# Altium PCB 110-00315-D_B1-DevKit.PcbDoc (part 6 of 9)
Units mil, origin at the board's own origin, x right, y up, seen from the top; angles counter-clockwise.
Board outline 5199.57 x 2702 mil, 8 copper layers (Top Layer, Layer 2-GND-Plane, Layer 3, Layer 4, Layer 5, Layer 6, Layer 7-PWR-Plane, Bottom Layer), stack 60.866 mil thick; 418 components, 298 nets, 1591 pads, 1631 vias.
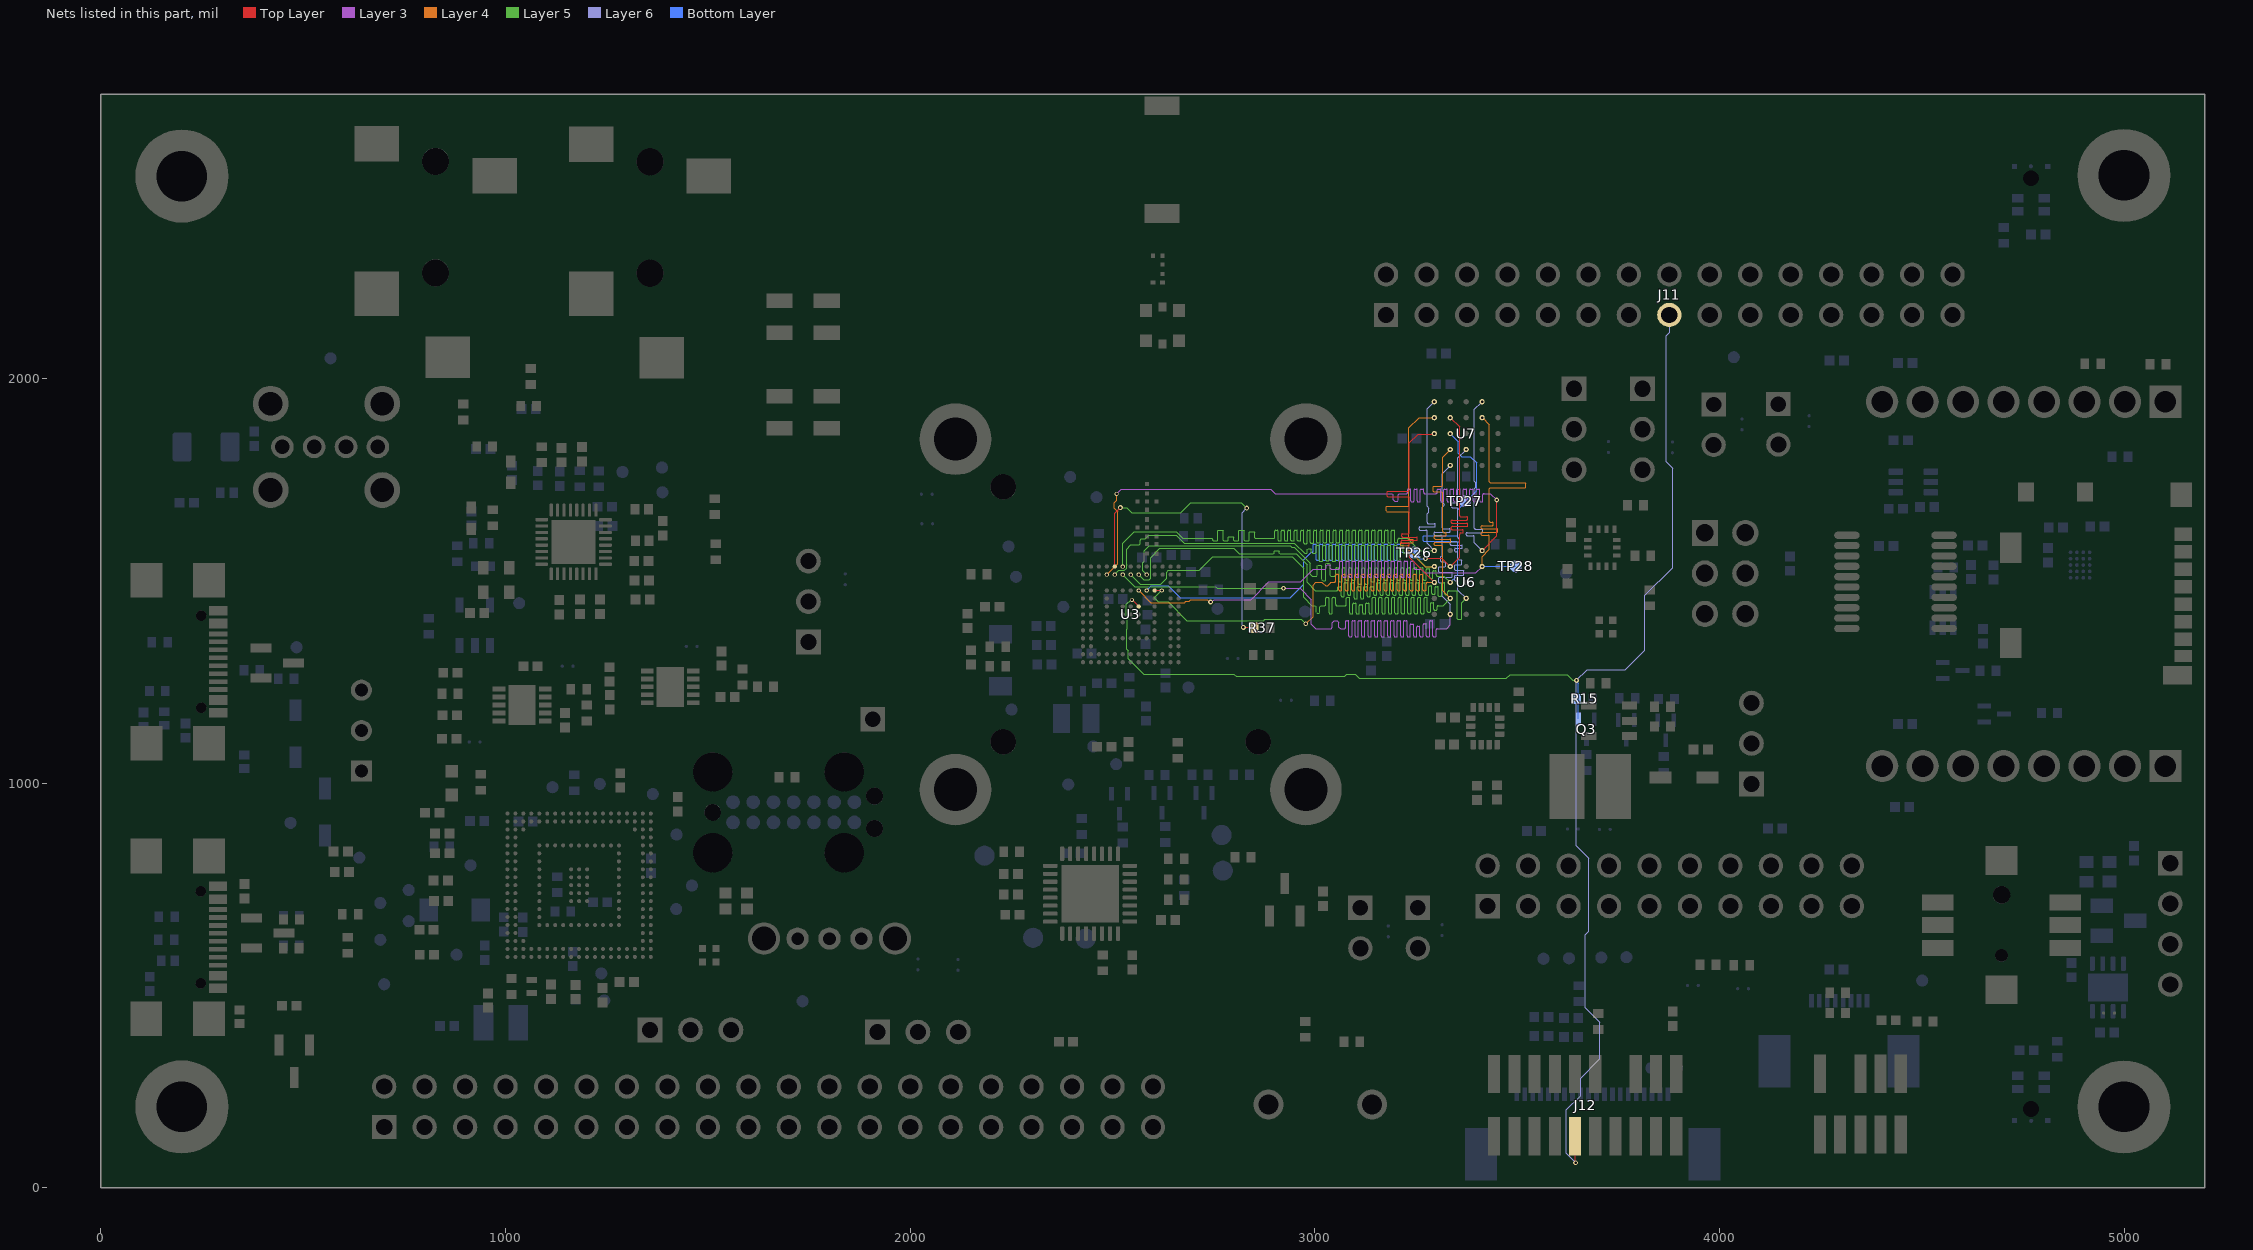
[diagram p11: the nets of this part, all layers, seen from the top]

## Via types
v1: diameter 20, hole 10, Top Layer to Bottom Layer, tented both sides, 773 vias
v2: diameter 12, hole 6, Top Layer to Bottom Layer, tented both sides, 549 vias
v3: diameter 12, hole 6, Top Layer to Bottom Layer, 194 vias
v4: diameter 10, hole 6, Top Layer to Bottom Layer, 101 vias
v5: diameter 10, hole 6, Top Layer to Bottom Layer, tented both sides, 10 vias
v6: diameter 15, hole 8, Top Layer to Bottom Layer, 4 vias

## Nets (pads, with @x,y where several pads share a name; then routed paths per layer and width w, separated by ;. In a path a pad name is that pad's centre, name@x,y a point inside that pad or via, vN(x,y) a via of type N, cw(c..) or ccw(c..) an arc to the next point about the centre after c; other vN are vias at no path point) (continued)
P3_0: TP27.1 U3.E2 U6.D3 U7.D3 | length 2529
  Top Layer w3: v3(3334.63,1496) U6.D3@3334.63,1496.69
  Layer 5 w3: v4(2584.32,1515.48) 2574.82,1524.98 2574.82,1544.87 2578.52,1548.57 2578.52,1574.69 2590.13,1586.3 2939.03,1586.3 2942.53,1582.8 2949.53,1582.8 2988.53,1543.8 2988.53,1516.8 2993.53,1511.8 3004.53,1511.8 3006.53,1513.8 3006.53,1536.8 3008.53,1538.8 3014.53,1538.8 3017.53,1535.8 3017.53,1503.8 ; 3017.53,1502.8 3020.53,1499.8 3025.53,1499.8 3027.53,1501.8 3027.53,1542.04 3029.29,1543.8 3035.77,1543.8 3037.53,1542.04 ; 3037.53,1541.8 3037.53,1513.8 3039.53,1511.8 3047.18,1511.8 3048.68,1511.8 ccw(c3048.68,1514.8) 3051.68,1514.8 3051.68,1529.8 cw(c3053.68,1529.8) 3053.68,1531.8 3057.68,1531.8 cw(c3057.68,1529.8) 3059.68,1529.8 3059.68,1499.31 ccw(c3061.68,1499.31) 3061.68,1497.31 3065.68,1497.31 ccw(c3065.68,1499.31) 3067.68,1499.31 3067.68,1529.8 cw(c3069.68,1529.8) 3069.68,1531.8 3073.68,1531.8 cw(c3073.68,1529.8) 3075.68,1529.8 3075.68,1503.8 ccw(c3077.68,1503.8) 3077.68,1501.8 3081.68,1501.8 ccw(c3081.68,1503.8) 3083.68,1503.8 3083.68,1529.8 cw(c3085.68,1529.8) 3085.68,1531.8 3089.68,1531.8 cw(c3089.68,1529.8) 3091.68,1529.8 3091.68,1503.8 ccw(c3093.68,1503.8) 3093.68,1501.8 3097.68,1501.8 ccw(c3097.68,1503.8) 3099.68,1503.8 3099.68,1529.8 cw(c3101.68,1529.8) 3101.68,1531.8 3105.68,1531.8 cw(c3105.68,1529.8) 3107.68,1529.8 3107.68,1493.8 ccw(c3109.68,1493.8) 3109.68,1491.8 3113.68,1491.8 ccw(c3113.68,1493.8) 3115.68,1493.8 3115.68,1529.8 cw(c3117.68,1529.8) 3117.68,1531.8 3121.68,1531.8 cw(c3121.68,1529.8) 3123.68,1529.8 3123.68,1493.8 ccw(c3125.68,1493.8) 3125.68,1491.8 3129.68,1491.8 ccw(c3129.68,1493.8) 3131.68,1493.8 3131.68,1529.8 cw(c3133.68,1529.8) 3133.68,1531.8 3137.68,1531.8 cw(c3137.68,1529.8) 3139.68,1529.8 3139.68,1499.34 ccw(c3141.68,1499.34) 3141.68,1497.34 3145.68,1497.34 ccw(c3145.68,1499.34) 3147.68,1499.34 3147.68,1529.8 cw(c3149.68,1529.8) 3149.68,1531.8 3153.68,1531.8 cw(c3153.68,1529.8) 3155.68,1529.8 3155.68,1503.8 ccw(c3157.68,1503.8) 3157.68,1501.8 3161.68,1501.8 ccw(c3161.68,1503.8) 3163.68,1503.8 3163.68,1529.8 cw(c3165.68,1529.8) 3165.68,1531.8 3169.68,1531.8 cw(c3169.68,1529.8) 3171.68,1529.8 3171.68,1503.8 ccw(c3173.68,1503.8) 3173.68,1501.8 3177.68,1501.8 ccw(c3177.68,1503.8) 3179.68,1503.8 3179.68,1529.8 cw(c3181.68,1529.8) 3181.68,1531.8 3185.68,1531.8 cw(c3185.68,1529.8) 3187.68,1529.8 3187.68,1503.8 ccw(c3189.68,1503.8) 3189.68,1501.8 3193.68,1501.8 ccw(c3193.68,1503.8) 3195.68,1503.8 3195.68,1529.8 cw(c3197.68,1529.8) 3197.68,1531.8 3201.68,1531.8 cw(c3201.68,1529.8) 3203.68,1529.8 3203.68,1503.8 ccw(c3205.68,1503.8) 3205.68,1501.8 3209.68,1501.8 ccw(c3209.68,1503.8) 3211.68,1503.8 3211.68,1529.8 cw(c3213.68,1529.8) 3213.68,1531.8 3217.68,1531.8 cw(c3217.68,1529.8) 3219.68,1529.8 3219.68,1503.8 ccw(c3221.68,1503.8) 3221.68,1501.8 3225.68,1501.8 ccw(c3225.68,1503.8) 3227.68,1503.8 3227.68,1529.8 cw(c3229.68,1529.8) 3229.68,1531.8 3233.68,1531.8 cw(c3233.68,1529.8) 3235.68,1529.8 3235.68,1503.8 ccw(c3237.68,1503.8) 3237.68,1501.8 3241.68,1501.8 ccw(c3241.68,1503.8) 3243.68,1503.8 3243.68,1529.8 cw(c3245.68,1529.8) 3245.68,1531.8 3249.68,1531.8 cw(c3249.68,1529.8) 3251.68,1529.8 3251.68,1503.8 ccw(c3253.68,1503.8) 3253.68,1501.8 3257.68,1501.8 ccw(c3257.68,1503.8) 3259.68,1503.8 3259.68,1529.8 cw(c3261.68,1529.8) 3261.68,1531.8 3265.68,1531.8 cw(c3265.68,1529.8) 3267.68,1529.8 3267.68,1503.8 ccw(c3269.68,1503.8) 3269.68,1501.8 3273.68,1501.8 ccw(c3273.68,1503.8) 3275.68,1503.8 3275.68,1527.37 cw(c3277.68,1527.37) 3277.68,1529.37 3281.68,1529.37 cw(c3281.68,1527.37) 3283.68,1527.37 3283.68,1508.5 ccw(c3285.68,1508.5) 3285.68,1506.5 3289.68,1506.5 ccw(c3289.68,1508.5) 3291.68,1508.5 3291.68,1522.87 cw(c3293.68,1522.87) 3293.68,1524.87 3297.68,1524.87 cw(c3297.68,1522.87) 3299.68,1522.87 3299.68,1514.8 ccw(c3302.68,1514.8) 3302.68,1511.8 3311.53,1511.8 3318.84,1511.8 v3(3334.63,1496)
  Layer 4 w3: v3(3334.61,1863.88) 3335.61,1862.88 v3@3335.61,1861.88
  Bottom Layer w3: v3@3333.53,1864.8 v3@3333.69,1864.8 ; v3@3333.53,1865.8 3333.53,1864.95 v3@3333.69,1864.8 ; v3(3334.63,1496) 3352.53,1513.9 3352.53,1595 3352.53,1596.5 3350.77,1598.26 3268.98,1598.26 3267.68,1599.56 3267.68,1609.96 3268.98,1611.26 3350.77,1611.26 3352.53,1613.02 3352.53,1626 3352.53,1675.8 3372.49,1695.75 3399.53,1722.8 3399.53,1791.8 3384.53,1806.8 3363.53,1806.8 3354.53,1815.8 3354.53,1843.95 v3(3334.61,1863.88) v3@3333.69,1864.8
P3_1: TP26.1 U3.E4 U6.D2 U7.D2 | length 2451.6
  Top Layer w3: v3(3273.53,1554.8) 3274.53,1555.8 3314.21,1555.8 v3(3334.63,1535.37) 3357.53,1558.27 3357.53,1563.8 3357.53,1615.3 cw(c3360.53,1615.3) 3360.53,1618.3 3364.46,1618.3 ccw(c3364.46,1620.3) 3366.46,1620.3 3366.46,1624.3 ccw(c3364.46,1624.3) 3364.46,1626.3 3339.53,1626.3 cw(c3339.53,1628.3) 3337.53,1628.3 3337.53,1632.3 cw(c3339.53,1632.3) 3339.53,1634.3 3375.53,1634.3 ccw(c3375.53,1636.3) 3377.53,1636.3 3377.53,1640.3 ccw(c3375.53,1640.3) 3375.53,1642.3 3339.53,1642.3 cw(c3339.53,1644.3) 3337.53,1644.3 3337.53,1648.3 cw(c3339.53,1648.3) 3339.53,1650.3 3375.53,1650.3 ccw(c3375.53,1652.3) 3377.53,1652.3 3377.53,1656.3 ccw(c3375.53,1656.3) 3375.53,1658.3 3360.53,1658.3 cw(c3360.53,1661.3) 3357.53,1661.3 3357.53,1662.8 3357.53,1880.32 v3(3334.61,1903.25) ; U7.D2@3335.53,1902.32 U7.D2@3335.53,1904.8
  Bottom Layer w3: v4(2584.32,1476.11) 2596,1487.8 2637.94,1487.8 2667.54,1458.2 2938.93,1458.2 2972.53,1491.8 2972.53,1551.8 2991.31,1570.57 2991.53,1570.57 2993.03,1570.57 ccw(c2993.03,1573.57) 2996.03,1573.57 2996.03,1588.57 cw(c2998.03,1588.57) 2998.03,1590.57 3002.03,1590.57 cw(c3002.03,1588.57) 3004.03,1588.57 3004.03,1552.57 ccw(c3006.03,1552.57) 3006.03,1550.57 3010.03,1550.57 ccw(c3010.03,1552.57) 3012.03,1552.57 3012.03,1588.57 cw(c3014.03,1588.57) 3014.03,1590.57 3018.03,1590.57 cw(c3018.03,1588.57) 3020.03,1588.57 3020.03,1552.57 ccw(c3022.03,1552.57) 3022.03,1550.57 3026.03,1550.57 ccw(c3026.03,1552.57) 3028.03,1552.57 3028.03,1588.57 cw(c3030.03,1588.57) 3030.03,1590.57 3034.03,1590.57 cw(c3034.03,1588.57) 3036.03,1588.57 3036.03,1552.57 ccw(c3038.03,1552.57) 3038.03,1550.57 3042.03,1550.57 ccw(c3042.03,1552.57) 3044.03,1552.57 3044.03,1588.57 cw(c3046.03,1588.57) 3046.03,1590.57 3050.03,1590.57 cw(c3050.03,1588.57) 3052.03,1588.57 3052.03,1552.57 ccw(c3054.03,1552.57) 3054.03,1550.57 3058.03,1550.57 ccw(c3058.03,1552.57) 3060.03,1552.57 3060.03,1588.57 cw(c3062.03,1588.57) 3062.03,1590.57 3066.03,1590.57 cw(c3066.03,1588.57) 3068.03,1588.57 3068.03,1552.57 ccw(c3070.03,1552.57) 3070.03,1550.57 3074.03,1550.57 ccw(c3074.03,1552.57) 3076.03,1552.57 3076.03,1588.57 cw(c3078.03,1588.57) 3078.03,1590.57 3082.03,1590.57 cw(c3082.03,1588.57) 3084.03,1588.57 3084.03,1552.57 ccw(c3086.03,1552.57) 3086.03,1550.57 3090.03,1550.57 ccw(c3090.03,1552.57) 3092.03,1552.57 3092.03,1588.57 cw(c3094.03,1588.57) 3094.03,1590.57 3098.03,1590.57 cw(c3098.03,1588.57) 3100.03,1588.57 3100.03,1552.57 ccw(c3102.03,1552.57) 3102.03,1550.57 3106.03,1550.57 ccw(c3106.03,1552.57) 3108.03,1552.57 3108.03,1588.57 cw(c3110.03,1588.57) 3110.03,1590.57 3114.03,1590.57 cw(c3114.03,1588.57) 3116.03,1588.57 3116.03,1552.57 ccw(c3118.03,1552.57) 3118.03,1550.57 3122.03,1550.57 ccw(c3122.03,1552.57) 3124.03,1552.57 3124.03,1588.57 cw(c3126.03,1588.57) 3126.03,1590.57 3130.03,1590.57 cw(c3130.03,1588.57) 3132.03,1588.57 3132.03,1552.57 ccw(c3134.03,1552.57) 3134.03,1550.57 3138.03,1550.57 ccw(c3138.03,1552.57) 3140.03,1552.57 3140.03,1588.57 cw(c3142.03,1588.57) 3142.03,1590.57 3146.03,1590.57 cw(c3146.03,1588.57) 3148.03,1588.57 3148.03,1552.57 ccw(c3150.03,1552.57) 3150.03,1550.57 3154.03,1550.57 ccw(c3154.03,1552.57) 3156.03,1552.57 3156.03,1588.57 cw(c3158.03,1588.57) 3158.03,1590.57 3162.03,1590.57 cw(c3162.03,1588.57) 3164.03,1588.57 3164.03,1552.57 ccw(c3166.03,1552.57) 3166.03,1550.57 3170.03,1550.57 ccw(c3170.03,1552.57) 3172.03,1552.57 3172.03,1588.57 cw(c3174.03,1588.57) 3174.03,1590.57 3178.03,1590.57 cw(c3178.03,1588.57) 3180.03,1588.57 3180.03,1552.57 ccw(c3182.03,1552.57) 3182.03,1550.57 3186.03,1550.57 ccw(c3186.03,1552.57) 3188.03,1552.57 3188.03,1588.57 cw(c3190.03,1588.57) 3190.03,1590.57 3194.03,1590.57 cw(c3194.03,1588.57) 3196.03,1588.57 3196.03,1552.57 ccw(c3198.03,1552.57) 3198.03,1550.57 3202.03,1550.57 ccw(c3202.03,1552.57) 3204.03,1552.57 3204.03,1588.57 cw(c3206.03,1588.57) 3206.03,1590.57 3210.03,1590.57 cw(c3210.03,1588.57) 3212.03,1588.57 3212.03,1573.57 ccw(c3215.03,1573.57) 3215.03,1570.57 3226.53,1570.57 3244.81,1570.57 TP26.1@3245.58,1569.8 3260.58,1554.8 v3(3273.53,1554.8)
P3_2: U3.F2 U6.C4 U7.C4 | length 2556.4
  Layer 5 w3: v4@2566.12,1514 2577,1503.11 2591.16,1503.11 2594.5,1506.45 2594.5,1557.5 2617,1580 2799.55,1580 2812.75,1566.8 2896,1566.8 2897.5,1566.8 2899.26,1568.55 2899.26,1572.72 2900.56,1574.02 2910.96,1574.02 2912.26,1572.72 2912.26,1568.55 2914.02,1566.8 2938,1566.8 2953.53,1566.8 2981,1539.33 2981,1496.33 3001.53,1475.8 3052.53,1475.8 3054.03,1475.8 ccw(c3054.03,1478.8) 3057.03,1478.8 3057.03,1483.8 cw(c3059.03,1483.8) 3059.03,1485.8 3063.03,1485.8 cw(c3063.03,1483.8) 3065.03,1483.8 3065.03,1462.94 ccw(c3067.03,1462.94) 3067.03,1460.94 3071.03,1460.94 ccw(c3071.03,1462.94) 3073.03,1462.94 3073.03,1493.8 cw(c3075.03,1493.8) 3075.03,1495.8 3079.03,1495.8 cw(c3079.03,1493.8) 3081.03,1493.8 3081.03,1466.8 ccw(c3083.03,1466.8) 3083.03,1464.8 3087.03,1464.8 ccw(c3087.03,1466.8) 3089.03,1466.8 3089.03,1493.8 cw(c3091.03,1493.8) 3091.03,1495.8 3095.03,1495.8 cw(c3095.03,1493.8) 3097.03,1493.8 3097.03,1457.8 ccw(c3099.03,1457.8) 3099.03,1455.8 3103.03,1455.8 ccw(c3103.03,1457.8) 3105.03,1457.8 3105.03,1483.8 cw(c3107.03,1483.8) 3107.03,1485.8 3111.03,1485.8 cw(c3111.03,1483.8) 3113.03,1483.8 3113.03,1457.8 ccw(c3115.03,1457.8) 3115.03,1455.8 3119.03,1455.8 ccw(c3119.03,1457.8) 3121.03,1457.8 3121.03,1483.8 cw(c3123.03,1483.8) 3123.03,1485.8 3127.03,1485.8 cw(c3127.03,1483.8) 3129.03,1483.8 3129.03,1462.94 ccw(c3131.03,1462.94) 3131.03,1460.94 3135.03,1460.94 ccw(c3135.03,1462.94) 3137.03,1462.94 3137.03,1483.8 cw(c3139.03,1483.8) 3139.03,1485.8 3143.03,1485.8 cw(c3143.03,1483.8) 3145.03,1483.8 3145.03,1466.8 ccw(c3147.03,1466.8) 3147.03,1464.8 3151.03,1464.8 ccw(c3151.03,1466.8) 3153.03,1466.8 3153.03,1493.8 cw(c3155.03,1493.8) 3155.03,1495.8 3159.03,1495.8 cw(c3159.03,1493.8) 3161.03,1493.8 3161.03,1466.8 ccw(c3163.03,1466.8) 3163.03,1464.8 3167.03,1464.8 ccw(c3167.03,1466.8) 3169.03,1466.8 3169.03,1493.8 cw(c3171.03,1493.8) 3171.03,1495.8 3175.03,1495.8 cw(c3175.03,1493.8) 3177.03,1493.8 3177.03,1466.8 ccw(c3179.03,1466.8) 3179.03,1464.8 3183.03,1464.8 ccw(c3183.03,1466.8) 3185.03,1466.8 3185.03,1493.8 cw(c3187.03,1493.8) 3187.03,1495.8 3191.03,1495.8 cw(c3191.03,1493.8) 3193.03,1493.8 3193.03,1466.8 ccw(c3195.03,1466.8) 3195.03,1464.8 3199.03,1464.8 ccw(c3199.03,1466.8) 3201.03,1466.8 3201.03,1493.8 cw(c3203.03,1493.8) 3203.03,1495.8 3207.03,1495.8 cw(c3207.03,1493.8) 3209.03,1493.8 3209.03,1466.8 ccw(c3211.03,1466.8) 3211.03,1464.8 3215.03,1464.8 ccw(c3215.03,1466.8) 3217.03,1466.8 3217.03,1493.8 cw(c3219.03,1493.8) 3219.03,1495.8 3223.03,1495.8 cw(c3223.03,1493.8) 3225.03,1493.8 3225.03,1466.8 ccw(c3227.03,1466.8) 3227.03,1464.8 3231.03,1464.8 ccw(c3231.03,1466.8) 3233.03,1466.8 3233.03,1493.8 cw(c3235.03,1493.8) 3235.03,1495.8 3239.03,1495.8 cw(c3239.03,1493.8) 3241.03,1493.8 3241.03,1466.8 ccw(c3243.03,1466.8) 3243.03,1464.8 3247.03,1464.8 ccw(c3247.03,1466.8) 3249.03,1466.8 3249.03,1493.8 cw(c3251.03,1493.8) 3251.03,1495.8 3255.03,1495.8 cw(c3255.03,1493.8) 3257.03,1493.8 3257.03,1466.8 ccw(c3259.03,1466.8) 3259.03,1464.8 3263.03,1464.8 ccw(c3263.03,1466.8) 3265.03,1466.8 3265.03,1493.8 cw(c3267.03,1493.8) 3267.03,1495.8 3271.03,1495.8 cw(c3271.03,1493.8) 3273.03,1493.8 3273.03,1466.8 ccw(c3275.03,1466.8) 3275.03,1464.8 3279.03,1464.8 ccw(c3279.03,1466.8) 3281.03,1466.8 3281.03,1485.38 cw(c3283.03,1485.38) 3283.03,1487.38 3287.03,1487.38 cw(c3287.03,1485.38) 3289.03,1485.38 3289.03,1469.13 ccw(c3291.03,1469.13) 3291.03,1467.13 3295.03,1467.13 ccw(c3295.03,1469.13) 3297.03,1469.13 3297.03,1483.5 cw(c3299.03,1483.5) 3299.03,1485.5 3303.03,1485.5 cw(c3303.03,1483.5) 3305.03,1483.5 3305.03,1463.71 ccw(c3307.03,1463.71) 3307.03,1461.71 3311.03,1461.71 ccw(c3311.03,1463.71) 3313.03,1463.71 3313.03,1493.8 cw(c3315.03,1493.8) 3315.03,1495.8 3319.03,1495.8 cw(c3319.03,1493.8) 3321.03,1493.8 3321.03,1467.88 ccw(c3323.03,1467.88) 3323.03,1465.88 3327.03,1465.88 ccw(c3327.03,1467.88) 3329.03,1467.88 3329.03,1472.8 cw(c3332.03,1472.8) 3332.03,1475.8 3341.53,1475.8 3343.53,1475.8 3350.24,1475.8 3352,1474.04 3352,1406.55 3353.76,1404.8 3361.24,1404.8 3363,1406.55 3363,1445.63 v2(3374,1456.63)
  Layer 6 w3: v2(3374,1456.63) 3353.53,1477.1 3353.53,1497 3353.53,1498.5 3351.77,1500.26 3346.43,1500.26 3345.13,1501.56 3345.13,1511.96 3346.43,1513.26 3366.97,1513.26 3368.27,1514.56 3368.27,1524.96 3366.97,1526.26 3346.43,1526.26 3345.13,1527.56 3345.13,1537.96 3346.43,1539.26 3362.2,1539.26 3363.5,1540.56 3363.5,1550.96 3362.2,1552.26 3355.29,1552.26 3353.53,1554.02 3353.53,1566 3353.53,1567.8 3353.53,1569.3 ccw(c3350.53,1569.3) 3350.53,1572.3 3347.13,1572.3 cw(c3347.13,1574.3) 3345.13,1574.3 3345.13,1578.3 cw(c3347.13,1578.3) 3347.13,1580.3 3362.71,1580.3 ccw(c3362.71,1582.3) 3364.71,1582.3 3364.71,1586.3 ccw(c3362.71,1586.3) 3362.71,1588.3 3337.11,1588.3 cw(c3337.11,1590.3) 3335.11,1590.3 3335.11,1594.3 cw(c3337.11,1594.3) 3337.11,1596.3 3356.53,1596.3 ccw(c3356.53,1598.3) 3358.53,1598.3 3358.53,1602.3 ccw(c3356.53,1602.3) 3356.53,1604.3 cw(c3356.53,1607.3) 3353.53,1607.3 3353.53,1647.8 3353.53,1677 3353.53,1678.5 3351.77,1680.26 3339.47,1680.26 3338.17,1681.56 3338.17,1691.96 3339.47,1693.26 3351.77,1693.26 3353.53,1695.02 3353.53,1753 3353.53,1804.06 v3(3373.98,1824.51)
  other v4: 2564.63,1515.48
P3_3: U3.G2 U6.D4 U7.D4 | length 2563.1
  Layer 5 w3: v4(2544.95,1515.48) 2568.57,1491.86 2618.6,1491.86 2633.53,1506.8 2633.53,1521.8 2637.4,1525.67 2714.67,1525.67 2748,1559 2944.33,1559 2972.53,1530.8 2972.53,1458.8 2992.53,1438.8 3001.53,1438.8 3003.53,1436.8 3003.53,1421.8 ; 3004.54,1420.79 3005.53,1419.8 3010.53,1419.8 3012.53,1421.8 3012.53,1435.8 3015.53,1438.8 3022.53,1438.8 3024.03,1438.8 ccw(c3024.03,1441.8) 3027.03,1441.8 3027.03,1456.8 cw(c3029.03,1456.8) 3029.03,1458.8 3033.03,1458.8 cw(c3033.03,1456.8) 3035.03,1456.8 3035.03,1420.8 ccw(c3037.03,1420.8) 3037.03,1418.8 3041.03,1418.8 ccw(c3041.03,1420.8) 3043.03,1420.8 3043.03,1456.8 cw(c3045.03,1456.8) 3045.03,1458.8 3049.03,1458.8 cw(c3049.03,1456.8) 3051.03,1456.8 3051.03,1441.8 ccw(c3054.03,1441.8) 3054.03,1438.8 3066.53,1438.8 3073.53,1438.8 3075.03,1438.8 ccw(c3075.03,1441.8) 3078.03,1441.8 3078.03,1456.8 cw(c3080.03,1456.8) 3080.03,1458.8 3084.03,1458.8 cw(c3084.03,1456.8) 3086.03,1456.8 3086.03,1420.8 ccw(c3088.03,1420.8) 3088.03,1418.8 3092.03,1418.8 ccw(c3092.03,1420.8) 3094.03,1420.8 3094.03,1442.59 cw(c3096.03,1442.59) 3096.03,1444.59 3100.03,1444.59 cw(c3100.03,1442.59) 3102.03,1442.59 3102.03,1420.8 ccw(c3104.03,1420.8) 3104.03,1418.8 3108.03,1418.8 ccw(c3108.03,1420.8) 3110.03,1420.8 3110.03,1438.8 cw(c3112.03,1438.8) 3112.03,1440.8 3116.03,1440.8 cw(c3116.03,1438.8) 3118.03,1438.8 3118.03,1420.8 ccw(c3120.03,1420.8) 3120.03,1418.8 3124.03,1418.8 ccw(c3124.03,1420.8) 3126.03,1420.8 3126.03,1442.8 cw(c3128.03,1442.8) 3128.03,1444.8 3132.03,1444.8 cw(c3132.03,1442.8) 3134.03,1442.8 3134.03,1420.8 ccw(c3136.03,1420.8) 3136.03,1418.8 3140.03,1418.8 ccw(c3140.03,1420.8) 3142.03,1420.8 3142.03,1456.8 cw(c3144.03,1456.8) 3144.03,1458.8 3148.03,1458.8 cw(c3148.03,1456.8) 3150.03,1456.8 3150.03,1420.8 ccw(c3152.03,1420.8) 3152.03,1418.8 3156.03,1418.8 ccw(c3156.03,1420.8) 3158.03,1420.8 3158.03,1456.8 cw(c3160.03,1456.8) 3160.03,1458.8 3164.03,1458.8 cw(c3164.03,1456.8) 3166.03,1456.8 3166.03,1420.8 ccw(c3168.03,1420.8) 3168.03,1418.8 3172.03,1418.8 ccw(c3172.03,1420.8) 3174.03,1420.8 3174.03,1456.8 cw(c3176.03,1456.8) 3176.03,1458.8 3180.03,1458.8 cw(c3180.03,1456.8) 3182.03,1456.8 3182.03,1420.8 ccw(c3184.03,1420.8) 3184.03,1418.8 3188.03,1418.8 ccw(c3188.03,1420.8) 3190.03,1420.8 3190.03,1456.8 cw(c3192.03,1456.8) 3192.03,1458.8 3196.03,1458.8 cw(c3196.03,1456.8) 3198.03,1456.8 3198.03,1420.8 ccw(c3200.03,1420.8) 3200.03,1418.8 3204.03,1418.8 ccw(c3204.03,1420.8) 3206.03,1420.8 3206.03,1456.8 cw(c3208.03,1456.8) 3208.03,1458.8 3212.03,1458.8 cw(c3212.03,1456.8) 3214.03,1456.8 3214.03,1420.8 ccw(c3216.03,1420.8) 3216.03,1418.8 3220.03,1418.8 ccw(c3220.03,1420.8) 3222.03,1420.8 3222.03,1456.8 cw(c3224.03,1456.8) 3224.03,1458.8 3228.03,1458.8 cw(c3228.03,1456.8) 3230.03,1456.8 3230.03,1420.8 ccw(c3232.03,1420.8) 3232.03,1418.8 3236.03,1418.8 ccw(c3236.03,1420.8) 3238.03,1420.8 3238.03,1456.8 cw(c3240.03,1456.8) 3240.03,1458.8 3244.03,1458.8 cw(c3244.03,1456.8) 3246.03,1456.8 3246.03,1420.8 ccw(c3248.03,1420.8) 3248.03,1418.8 3252.03,1418.8 ccw(c3252.03,1420.8) 3254.03,1420.8 3254.03,1456.8 cw(c3256.03,1456.8) 3256.03,1458.8 3260.03,1458.8 cw(c3260.03,1456.8) 3262.03,1456.8 3262.03,1420.8 ccw(c3264.03,1420.8) 3264.03,1418.8 3268.03,1418.8 ccw(c3268.03,1420.8) 3270.03,1420.8 3270.03,1456.8 cw(c3272.03,1456.8) 3272.03,1458.8 3276.03,1458.8 cw(c3276.03,1456.8) 3278.03,1456.8 3278.03,1424.88 ccw(c3280.03,1424.88) 3280.03,1422.88 3284.03,1422.88 ccw(c3284.03,1424.88) 3286.03,1424.88 3286.03,1444.13 cw(c3288.03,1444.13) 3288.03,1446.13 3292.03,1446.13 cw(c3292.03,1444.13) 3294.03,1444.13 3294.03,1429.76 ccw(c3296.03,1429.76) 3296.03,1427.76 3300.03,1427.76 ccw(c3300.03,1429.76) 3302.03,1429.76 3302.03,1435.8 cw(c3305.03,1435.8) 3305.03,1438.8 3310.53,1438.8 3316.8,1438.8 v2(3334.63,1456.63)
  Layer 4 w3: v2(3334.63,1456.63) 3315.53,1475.73 3315.53,1582.8 3315.53,1584.3 ccw(c3312.53,1584.3) 3312.53,1587.3 3297.53,1587.3 cw(c3297.53,1589.3) 3295.53,1589.3 3295.53,1593.3 cw(c3297.53,1593.3) 3297.53,1595.3 3333.53,1595.3 ccw(c3333.53,1597.3) 3335.53,1597.3 3335.53,1601.3 ccw(c3333.53,1601.3) 3333.53,1603.3 3297.53,1603.3 cw(c3297.53,1605.3) 3295.53,1605.3 3295.53,1609.3 cw(c3297.53,1609.3) 3297.53,1611.3 3322.47,1611.3 ccw(c3322.47,1613.3) 3324.47,1613.3 3324.47,1617.3 ccw(c3322.47,1617.3) 3322.47,1619.3 3318.53,1619.3 cw(c3318.53,1622.3) 3315.53,1622.3 3315.53,1670.8 3315.53,1716 3315.53,1717 3315.53,1718.5 3313.77,1720.26 3293.31,1720.26 3292.01,1721.56 3292.01,1731.96 3293.31,1733.26 3313.77,1733.26 3315.53,1735.02 3315.53,1749 3315.53,1772 3315.53,1805.43 v3(3334.61,1824.51) 3335.53,1825.43 v3@3335.53,1825.8
  Layer 6 w3: v3@3333.53,1823.43 v3@3333.53,1824.8
P3_4: U3.H2 U6.D5 U7.D5 | length 2531.1
  Layer 3 w3: v3(2922.53,1481.8) 2963.53,1481.8 2991.53,1453.8 2991.53,1392.8 3002.53,1381.8 3040.53,1381.8 3043.53,1384.8 3043.53,1396.8 3047.53,1400.8 3055.53,1400.8 3059.53,1396.8 3059.53,1385.8 3063.53,1381.8 3071.31,1381.8 3072.81,1381.8 ccw(c3072.81,1384.8) 3075.81,1384.8 3075.81,1399.8 cw(c3077.81,1399.8) 3077.81,1401.8 3081.81,1401.8 cw(c3081.81,1399.8) 3083.81,1399.8 3083.81,1363.8 ccw(c3085.81,1363.8) 3085.81,1361.8 3089.81,1361.8 ccw(c3089.81,1363.8) 3091.81,1363.8 3091.81,1399.8 cw(c3093.81,1399.8) 3093.81,1401.8 3097.81,1401.8 cw(c3097.81,1399.8) 3099.81,1399.8 3099.81,1363.8 ccw(c3101.81,1363.8) 3101.81,1361.8 3105.81,1361.8 ccw(c3105.81,1363.8) 3107.81,1363.8 3107.81,1399.8 cw(c3109.81,1399.8) 3109.81,1401.8 3113.81,1401.8 cw(c3113.81,1399.8) 3115.81,1399.8 3115.81,1363.8 ccw(c3117.81,1363.8) 3117.81,1361.8 3121.81,1361.8 ccw(c3121.81,1363.8) 3123.81,1363.8 3123.81,1399.8 cw(c3125.81,1399.8) 3125.81,1401.8 3129.81,1401.8 cw(c3129.81,1399.8) 3131.81,1399.8 3131.81,1363.8 ccw(c3133.81,1363.8) 3133.81,1361.8 3137.81,1361.8 ccw(c3137.81,1363.8) 3139.81,1363.8 3139.81,1399.8 cw(c3141.81,1399.8) 3141.81,1401.8 3145.81,1401.8 cw(c3145.81,1399.8) 3147.81,1399.8 3147.81,1363.8 ccw(c3149.81,1363.8) 3149.81,1361.8 3153.81,1361.8 ccw(c3153.81,1363.8) 3155.81,1363.8 3155.81,1399.8 cw(c3157.81,1399.8) 3157.81,1401.8 3161.81,1401.8 cw(c3161.81,1399.8) 3163.81,1399.8 3163.81,1363.8 ccw(c3165.81,1363.8) 3165.81,1361.8 3169.81,1361.8 ccw(c3169.81,1363.8) 3171.81,1363.8 3171.81,1399.8 cw(c3173.81,1399.8) 3173.81,1401.8 3177.81,1401.8 cw(c3177.81,1399.8) 3179.81,1399.8 3179.81,1363.8 ccw(c3181.81,1363.8) 3181.81,1361.8 3185.81,1361.8 ccw(c3185.81,1363.8) 3187.81,1363.8 3187.81,1399.8 cw(c3189.81,1399.8) 3189.81,1401.8 3193.81,1401.8 cw(c3193.81,1399.8) 3195.81,1399.8 3195.81,1363.8 ccw(c3197.81,1363.8) 3197.81,1361.8 3201.81,1361.8 ccw(c3201.81,1363.8) 3203.81,1363.8 3203.81,1399.8 cw(c3205.81,1399.8) 3205.81,1401.8 3209.81,1401.8 cw(c3209.81,1399.8) 3211.81,1399.8 3211.81,1363.8 ccw(c3213.81,1363.8) 3213.81,1361.8 3217.81,1361.8 ccw(c3217.81,1363.8) 3219.81,1363.8 3219.81,1399.8 cw(c3221.81,1399.8) 3221.81,1401.8 3225.81,1401.8 cw(c3225.81,1399.8) 3227.81,1399.8 3227.81,1363.8 ccw(c3229.81,1363.8) 3229.81,1361.8 3233.81,1361.8 ccw(c3233.81,1363.8) 3235.81,1363.8 3235.81,1391.06 cw(c3237.81,1391.06) 3237.81,1393.06 3241.81,1393.06 cw(c3241.81,1391.06) 3243.81,1391.06 3243.81,1363.8 ccw(c3245.81,1363.8) 3245.81,1361.8 3249.81,1361.8 ccw(c3249.81,1363.8) 3251.81,1363.8 3251.81,1385.3 cw(c3253.81,1385.3) 3253.81,1387.3 3257.81,1387.3 cw(c3257.81,1385.3) 3259.81,1385.3 3259.81,1363.8 ccw(c3261.81,1363.8) 3261.81,1361.8 3265.81,1361.8 ccw(c3265.81,1363.8) 3267.81,1363.8 3267.81,1391.52 cw(c3269.81,1391.52) 3269.81,1393.52 3273.81,1393.52 cw(c3273.81,1391.52) 3275.81,1391.52 3275.81,1363.8 ccw(c3277.81,1363.8) 3277.81,1361.8 3281.81,1361.8 ccw(c3281.81,1363.8) 3283.81,1363.8 3283.81,1399.8 cw(c3285.81,1399.8) 3285.81,1401.8 3289.81,1401.8 cw(c3289.81,1399.8) 3291.81,1399.8 3291.81,1363.8 ccw(c3293.81,1363.8) 3293.81,1361.8 3297.81,1361.8 ccw(c3297.81,1363.8) 3299.81,1363.8 3299.81,1378.8 cw(c3302.81,1378.8) 3302.81,1381.8 3313.53,1381.8 3325.53,1381.8 3334.63,1390.9 v2(3334.63,1417.26)
  Layer 5 w3: v4(2525.26,1515.48) 2554.88,1485.86 2755.14,1485.86 2759.21,1481.8 v3(2922.53,1481.8) ; v2@3334.58,1417.8 v2(3334.63,1417.26) v2(3334.63,1417.26)
  Layer 4 w3: v3(3334.61,1785.14) 3336.53,1787.06 v3@3336.53,1787.8
  Layer 6 w3: v2(3334.63,1417.26) 3334.63,1441.78 3314.53,1461.88 3314.53,1492 3314.53,1493.5 3312.77,1495.26 3307.06,1495.26 3305.76,1496.56 3305.76,1506.96 3307.06,1508.26 3337.83,1508.26 3339.13,1509.56 3339.13,1519.96 3337.83,1521.26 3307.06,1521.26 3305.76,1522.56 3305.76,1532.96 3307.06,1534.26 3321.61,1534.26 3322.91,1535.56 3322.91,1545.96 3321.61,1547.26 3312.77,1547.26 3311.47,1548.56 3311.47,1558.96 3312.77,1560.26 3314.53,1562.02 3314.53,1586 3314.53,1607.8 3314.53,1609.3 ccw(c3311.53,1609.3) 3311.53,1612.3 3296.53,1612.3 cw(c3296.53,1614.3) 3294.53,1614.3 3294.53,1618.3 cw(c3296.53,1618.3) 3296.53,1620.3 3332.53,1620.3 ccw(c3332.53,1622.3) 3334.53,1622.3 3334.53,1626.3 ccw(c3332.53,1626.3) 3332.53,1628.3 3317.53,1628.3 cw(c3317.53,1631.3) 3314.53,1631.3 3314.53,1663.8 3314.53,1681.8 3319.53,1686.8 3319.53,1689.8 3314.53,1694.8 3314.53,1765.06 3334.27,1784.8 v3@3335.53,1784.8
P3_5: U3.D4 U6.E3 U7.E3 | length 2588.5
  Top Layer w3: U3.D4@2604,1476.11 v4(2621.58,1476.11) 2622.26,1476.11 v4@2622.58,1475.8 ; U7.E3@3293.53,1864.8 3291.53,1862.8 3255.53,1862.8 3233.53,1840.8 3233.53,1752 3233.53,1723.02 3231.77,1721.26 3180.09,1721.26 3178.79,1719.96 3178.79,1709.56 3180.09,1708.26 3231.77,1708.26 3233.53,1706.5 3233.53,1705 3233.53,1661.8 3233.53,1619.3 cw(c3230.53,1619.3) 3230.53,1616.3 3216.16,1616.3 ccw(c3216.16,1614.3) 3214.16,1614.3 3214.16,1610.3 ccw(c3216.16,1610.3) 3216.16,1608.3 3251.53,1608.3 cw(c3251.53,1606.3) 3253.53,1606.3 3253.53,1602.3 cw(c3251.53,1602.3) 3251.53,1600.3 3215.53,1600.3 ccw(c3215.53,1598.3) 3213.53,1598.3 3213.53,1594.3 ccw(c3215.53,1594.3) 3215.53,1592.3 3230.53,1592.3 cw(c3230.53,1589.3) 3233.53,1589.3 3233.53,1587.8 3233.53,1557.73 v2(3295.26,1496)
  Layer 5 w3: v4(2621.58,1476.11) 2621.26,1476.11 2604,1458.86 2604,1456.37 2612.58,1447.8 2637.15,1447.8 2683.16,1401.8 2873.15,1401.8 2876.15,1404.8 2966.53,1404.8 v2(2977.53,1393.8)
  Layer 4 w3: v2(2977.53,1393.8) 2995.53,1411.8 2995.53,1488.8 3002.74,1496 3018.53,1496 ; 3018.53,1495.8 3026.53,1487.8 3031.53,1487.8 3039.53,1495.8 3039.53,1496 3046.53,1496 3048.03,1496 ccw(c3048.03,1499) 3051.03,1499 3051.03,1514 cw(c3053.03,1514) 3053.03,1516 3057.03,1516 cw(c3057.03,1514) 3059.03,1514 3059.03,1478 ccw(c3061.03,1478) 3061.03,1476 3065.03,1476 ccw(c3065.03,1478) 3067.03,1478 3067.03,1514 cw(c3069.03,1514) 3069.03,1516 3073.03,1516 cw(c3073.03,1514) 3075.03,1514 3075.03,1478 ccw(c3077.03,1478) 3077.03,1476 3081.03,1476 ccw(c3081.03,1478) 3083.03,1478 3083.03,1514 cw(c3085.03,1514) 3085.03,1516 3089.03,1516 cw(c3089.03,1514) 3091.03,1514 3091.03,1478 ccw(c3093.03,1478) 3093.03,1476 3097.03,1476 ccw(c3097.03,1478) 3099.03,1478 3099.03,1514 cw(c3101.03,1514) 3101.03,1516 3105.03,1516 cw(c3105.03,1514) 3107.03,1514 3107.03,1478 ccw(c3109.03,1478) 3109.03,1476 3113.03,1476 ccw(c3113.03,1478) 3115.03,1478 3115.03,1514 cw(c3117.03,1514) 3117.03,1516 3121.03,1516 cw(c3121.03,1514) 3123.03,1514 3123.03,1478 ccw(c3125.03,1478) 3125.03,1476 3129.03,1476 ccw(c3129.03,1478) 3131.03,1478 3131.03,1514 cw(c3133.03,1514) 3133.03,1516 3137.03,1516 cw(c3137.03,1514) 3139.03,1514 3139.03,1478 ccw(c3141.03,1478) 3141.03,1476 3145.03,1476 ccw(c3145.03,1478) 3147.03,1478 3147.03,1514 cw(c3149.03,1514) 3149.03,1516 3153.03,1516 cw(c3153.03,1514) 3155.03,1514 3155.03,1478 ccw(c3157.03,1478) 3157.03,1476 3161.03,1476 ccw(c3161.03,1478) 3163.03,1478 3163.03,1514 cw(c3165.03,1514) 3165.03,1516 3169.03,1516 cw(c3169.03,1514) 3171.03,1514 3171.03,1478 ccw(c3173.03,1478) 3173.03,1476 3177.03,1476 ccw(c3177.03,1478) 3179.03,1478 3179.03,1514 cw(c3181.03,1514) 3181.03,1516 3185.03,1516 cw(c3185.03,1514) 3187.03,1514 3187.03,1478 ccw(c3189.03,1478) 3189.03,1476 3193.03,1476 ccw(c3193.03,1478) 3195.03,1478 3195.03,1514 cw(c3197.03,1514) 3197.03,1516 3201.03,1516 cw(c3201.03,1514) 3203.03,1514 3203.03,1478 ccw(c3205.03,1478) 3205.03,1476 3209.03,1476 ccw(c3209.03,1478) 3211.03,1478 3211.03,1514 cw(c3213.03,1514) 3213.03,1516 3217.03,1516 cw(c3217.03,1514) 3219.03,1514 3219.03,1478 ccw(c3221.03,1478) 3221.03,1476 3225.03,1476 ccw(c3225.03,1478) 3227.03,1478 3227.03,1514 cw(c3229.03,1514) 3229.03,1516 3233.03,1516 cw(c3233.03,1514) 3235.03,1514 3235.03,1478 ccw(c3237.03,1478) 3237.03,1476 3241.03,1476 ccw(c3241.03,1478) 3243.03,1478 3243.03,1514 cw(c3245.03,1514) 3245.03,1516 3249.03,1516 cw(c3249.03,1514) 3251.03,1514 3251.03,1478 ccw(c3253.03,1478) 3253.03,1476 3257.03,1476 ccw(c3257.03,1478) 3259.03,1478 3259.03,1514 cw(c3261.03,1514) 3261.03,1516 3265.03,1516 cw(c3265.03,1514) 3267.03,1514 3267.03,1478 ccw(c3269.03,1478) 3269.03,1476 3273.03,1476 ccw(c3273.03,1478) 3275.03,1478 3275.03,1493 cw(c3278.03,1493) 3278.03,1496 3284.53,1496 v2(3295.26,1496) ; v2@3295.26,1496.07 v2@3295.53,1495.8 ; v3(3295.24,1863.88) 3295.61,1863.88 v3@3296.53,1864.8
P3_6: U3.J2 U6.E2 U7.E2 | length 2563.1
  Layer 5 w3: v4(2505.58,1515.48) 2515.76,1525.67 2529.4,1525.67 2534.76,1531.03 2534.76,1539.1 2534.53,1539.33 2534.53,1577.8 2545.53,1588.8 2565.53,1588.8 2568.53,1591.8 2568.53,1600.8 2571.53,1603.8 2580.77,1603.8 2589.08,1612.1 2657.5,1612.1 2676.8,1592.8 2949.53,1592.8 2974.53,1567.8 2979.53,1567.8 2981.53,1569.8 2981.53,1577.8 2983.53,1579.8 2989.53,1579.8 2991.53,1577.8 2991.53,1570.8 2994.53,1567.8 2998.53,1567.8 3000.03,1567.8 ccw(c3000.03,1570.8) 3003.03,1570.8 3003.03,1585.8 cw(c3005.03,1585.8) 3005.03,1587.8 3009.03,1587.8 cw(c3009.03,1585.8) 3011.03,1585.8 3011.03,1549.8 ccw(c3013.03,1549.8) 3013.03,1547.8 3017.03,1547.8 ccw(c3017.03,1549.8) 3019.03,1549.8 3019.03,1585.8 cw(c3021.03,1585.8) 3021.03,1587.8 3025.03,1587.8 cw(c3025.03,1585.8) 3027.03,1585.8 3027.03,1551.8 ccw(c3029.03,1551.8) 3029.03,1549.8 3033.03,1549.8 ccw(c3033.03,1551.8) 3035.03,1551.8 3035.03,1585.8 cw(c3037.03,1585.8) 3037.03,1587.8 3041.03,1587.8 cw(c3041.03,1585.8) 3043.03,1585.8 3043.03,1549.8 ccw(c3045.03,1549.8) 3045.03,1547.8 3049.03,1547.8 ccw(c3049.03,1549.8) 3051.03,1549.8 3051.03,1585.8 cw(c3053.03,1585.8) 3053.03,1587.8 3057.03,1587.8 cw(c3057.03,1585.8) 3059.03,1585.8 3059.03,1549.8 ccw(c3061.03,1549.8) 3061.03,1547.8 3065.03,1547.8 ccw(c3065.03,1549.8) 3067.03,1549.8 3067.03,1585.8 cw(c3069.03,1585.8) 3069.03,1587.8 3073.03,1587.8 cw(c3073.03,1585.8) 3075.03,1585.8 3075.03,1549.8 ccw(c3077.03,1549.8) 3077.03,1547.8 3081.03,1547.8 ccw(c3081.03,1549.8) 3083.03,1549.8 3083.03,1585.8 cw(c3085.03,1585.8) 3085.03,1587.8 3089.03,1587.8 cw(c3089.03,1585.8) 3091.03,1585.8 3091.03,1549.8 ccw(c3093.03,1549.8) 3093.03,1547.8 3097.03,1547.8 ccw(c3097.03,1549.8) 3099.03,1549.8 3099.03,1585.8 cw(c3101.03,1585.8) 3101.03,1587.8 3105.03,1587.8 cw(c3105.03,1585.8) 3107.03,1585.8 3107.03,1549.8 ccw(c3109.03,1549.8) 3109.03,1547.8 3113.03,1547.8 ccw(c3113.03,1549.8) 3115.03,1549.8 3115.03,1585.8 cw(c3117.03,1585.8) 3117.03,1587.8 3121.03,1587.8 cw(c3121.03,1585.8) 3123.03,1585.8 3123.03,1549.8 ccw(c3125.03,1549.8) 3125.03,1547.8 3129.03,1547.8 ccw(c3129.03,1549.8) 3131.03,1549.8 3131.03,1585.8 cw(c3133.03,1585.8) 3133.03,1587.8 3137.03,1587.8 cw(c3137.03,1585.8) 3139.03,1585.8 3139.03,1549.8 ccw(c3141.03,1549.8) 3141.03,1547.8 3145.03,1547.8 ccw(c3145.03,1549.8) 3147.03,1549.8 3147.03,1585.8 cw(c3149.03,1585.8) 3149.03,1587.8 3153.03,1587.8 cw(c3153.03,1585.8) 3155.03,1585.8 3155.03,1549.8 ccw(c3157.03,1549.8) 3157.03,1547.8 3161.03,1547.8 ccw(c3161.03,1549.8) 3163.03,1549.8 3163.03,1585.8 cw(c3165.03,1585.8) 3165.03,1587.8 3169.03,1587.8 cw(c3169.03,1585.8) 3171.03,1585.8 3171.03,1549.8 ccw(c3173.03,1549.8) 3173.03,1547.8 3177.03,1547.8 ccw(c3177.03,1549.8) 3179.03,1549.8 3179.03,1585.8 cw(c3181.03,1585.8) 3181.03,1587.8 3185.03,1587.8 cw(c3185.03,1585.8) 3187.03,1585.8 3187.03,1549.8 ccw(c3189.03,1549.8) 3189.03,1547.8 3193.03,1547.8 ccw(c3193.03,1549.8) 3195.03,1549.8 3195.03,1585.8 cw(c3197.03,1585.8) 3197.03,1587.8 3201.03,1587.8 cw(c3201.03,1585.8) 3203.03,1585.8 3203.03,1549.8 ccw(c3205.03,1549.8) 3205.03,1547.8 3209.03,1547.8 ccw(c3209.03,1549.8) 3211.03,1549.8 3211.03,1585.8 cw(c3213.03,1585.8) 3213.03,1587.8 3217.03,1587.8 cw(c3217.03,1585.8) 3219.03,1585.8 3219.03,1570.8 ccw(c3222.03,1570.8) 3222.03,1567.8 3232.53,1567.8 3241.53,1567.8 3273.96,1535.37 v3(3295.26,1535.37)
  Layer 4 w3: v3(3295.26,1535.37) 3272.96,1535.37 3232.53,1575.8 3232.53,1581.8 3232.53,1583.3 ccw(c3229.53,1583.3) 3229.53,1586.3 3214.53,1586.3 cw(c3214.53,1588.3) 3212.53,1588.3 3212.53,1592.3 cw(c3214.53,1592.3) 3214.53,1594.3 3241.62,1594.3 ccw(c3241.62,1596.3) 3243.62,1596.3 3243.62,1600.3 ccw(c3241.62,1600.3) 3241.62,1602.3 3235.53,1602.3 cw(c3235.53,1605.3) 3232.53,1605.3 3232.53,1656.8 3232.53,1668 3232.53,1669.5 3230.77,1671.26 3177.27,1671.26 3175.97,1672.56 3175.97,1682.96 3177.27,1684.26 3230.77,1684.26 3232.53,1686.02 3232.53,1713 3232.53,1877.8 3257.98,1903.25 3293.98,1903.25 v3@3295.53,1904.8
  Layer 6 w3: v3(3295.24,1903.25) 3296.08,1903.25 v3@3296.53,1902.8
P3_7: U3.H1 U6.E1 U7.E1 | length 2556.4
  Top Layer w3: U7.E1@3294.42,1941.8 U7.E1@3296.53,1941.8
  Layer 5 w3: v4(2525.26,1535.17) 2525.26,1592.53 2553.53,1620.8 2657.29,1620.8 2673.29,1604.8 2731,1604.8 2745.5,1604.8 2747.26,1603.04 2747.26,1600.1 2748.56,1598.8 2758.96,1598.8 2760.26,1600.1 2760.26,1624.18 2761.56,1625.48 2771.96,1625.48 2773.26,1624.18 2773.26,1600.1 2774.56,1598.8 2784.96,1598.8 2786.26,1600.1 2786.26,1607.1 2787.56,1608.4 2797.96,1608.4 2799.26,1607.1 2799.26,1600.1 2800.56,1598.8 2810.96,1598.8 2812.26,1600.1 2812.26,1624.18 2813.56,1625.48 2823.96,1625.48 2825.26,1624.18 2825.26,1600.1 2826.56,1598.8 2836.96,1598.8 2838.26,1600.1 2838.26,1619.99 2839.56,1621.29 2849.96,1621.29 2851.26,1619.99 2851.26,1606.55 2853.02,1604.8 2878,1604.8 2896.49,1604.8 2897.99,1604.8 ccw(c2897.99,1607.8) 2900.99,1607.8 2900.99,1622.8 cw(c2902.99,1622.8) 2902.99,1624.8 2906.99,1624.8 cw(c2906.99,1622.8) 2908.99,1622.8 2908.99,1600.8 ccw(c2910.99,1600.8) 2910.99,1598.8 2914.99,1598.8 ccw(c2914.99,1600.8) 2916.99,1600.8 2916.99,1622.8 cw(c2918.99,1622.8) 2918.99,1624.8 2922.99,1624.8 cw(c2922.99,1622.8) 2924.99,1622.8 2924.99,1600.8 ccw(c2926.99,1600.8) 2926.99,1598.8 2930.99,1598.8 ccw(c2930.99,1600.8) 2932.99,1600.8 2932.99,1622.8 cw(c2934.99,1622.8) 2934.99,1624.8 2938.99,1624.8 cw(c2938.99,1622.8) 2940.99,1622.8 2940.99,1600.8 ccw(c2942.99,1600.8) 2942.99,1598.8 2946.99,1598.8 ccw(c2946.99,1600.8) 2948.99,1600.8 2948.99,1622.8 cw(c2950.99,1622.8) 2950.99,1624.8 2954.99,1624.8 cw(c2954.99,1622.8) 2956.99,1622.8 2956.99,1600.8 ccw(c2958.99,1600.8) 2958.99,1598.8 2962.99,1598.8 ccw(c2962.99,1600.8) 2964.99,1600.8 2964.99,1622.8 cw(c2966.99,1622.8) 2966.99,1624.8 2970.99,1624.8 cw(c2970.99,1622.8) 2972.99,1622.8 2972.99,1593.82 ccw(c2974.99,1593.82) 2974.99,1591.82 2978.99,1591.82 ccw(c2978.99,1593.82) 2980.99,1593.82 2980.99,1622.8 cw(c2982.99,1622.8) 2982.99,1624.8 2986.99,1624.8 cw(c2986.99,1622.8) 2988.99,1622.8 2988.99,1594.87 ccw(c2990.99,1594.87) 2990.99,1592.87 2994.99,1592.87 ccw(c2994.99,1594.87) 2996.99,1594.87 2996.99,1622.8 cw(c2998.99,1622.8) 2998.99,1624.8 3002.99,1624.8 cw(c3002.99,1622.8) 3004.99,1622.8 3004.99,1595.8 ccw(c3006.99,1595.8) 3006.99,1593.8 3010.99,1593.8 ccw(c3010.99,1595.8) 3012.99,1595.8 3012.99,1622.8 cw(c3014.99,1622.8) 3014.99,1624.8 3018.99,1624.8 cw(c3018.99,1622.8) 3020.99,1622.8 3020.99,1595.8 ccw(c3022.99,1595.8) 3022.99,1593.8 3026.99,1593.8 ccw(c3026.99,1595.8) 3028.99,1595.8 3028.99,1622.8 cw(c3030.99,1622.8) 3030.99,1624.8 3034.99,1624.8 cw(c3034.99,1622.8) 3036.99,1622.8 3036.99,1595.8 ccw(c3038.99,1595.8) 3038.99,1593.8 3042.99,1593.8 ccw(c3042.99,1595.8) 3044.99,1595.8 3044.99,1622.8 cw(c3046.99,1622.8) 3046.99,1624.8 3050.99,1624.8 cw(c3050.99,1622.8) 3052.99,1622.8 3052.99,1595.8 ccw(c3054.99,1595.8) 3054.99,1593.8 3058.99,1593.8 ccw(c3058.99,1595.8) 3060.99,1595.8 3060.99,1622.8 cw(c3062.99,1622.8) 3062.99,1624.8 3066.99,1624.8 cw(c3066.99,1622.8) 3068.99,1622.8 3068.99,1595.8 ccw(c3070.99,1595.8) 3070.99,1593.8 3074.99,1593.8 ccw(c3074.99,1595.8) 3076.99,1595.8 3076.99,1622.8 cw(c3078.99,1622.8) 3078.99,1624.8 3082.99,1624.8 cw(c3082.99,1622.8) 3084.99,1622.8 3084.99,1595.8 ccw(c3086.99,1595.8) 3086.99,1593.8 3090.99,1593.8 ccw(c3090.99,1595.8) 3092.99,1595.8 3092.99,1622.8 cw(c3094.99,1622.8) 3094.99,1624.8 3098.99,1624.8 cw(c3098.99,1622.8) 3100.99,1622.8 3100.99,1595.8 ccw(c3102.99,1595.8) 3102.99,1593.8 3106.99,1593.8 ccw(c3106.99,1595.8) 3108.99,1595.8 3108.99,1622.8 cw(c3110.99,1622.8) 3110.99,1624.8 3114.99,1624.8 cw(c3114.99,1622.8) 3116.99,1622.8 3116.99,1595.8 ccw(c3118.99,1595.8) 3118.99,1593.8 3122.99,1593.8 ccw(c3122.99,1595.8) 3124.99,1595.8 3124.99,1622.8 cw(c3126.99,1622.8) 3126.99,1624.8 3130.99,1624.8 cw(c3130.99,1622.8) 3132.99,1622.8 3132.99,1595.8 ccw(c3134.99,1595.8) 3134.99,1593.8 3138.99,1593.8 ccw(c3138.99,1595.8) 3140.99,1595.8 3140.99,1622.8 cw(c3142.99,1622.8) 3142.99,1624.8 3146.99,1624.8 cw(c3146.99,1622.8) 3148.99,1622.8 3148.99,1595.8 ccw(c3150.99,1595.8) 3150.99,1593.8 3154.99,1593.8 ccw(c3154.99,1595.8) 3156.99,1595.8 3156.99,1622.8 cw(c3158.99,1622.8) 3158.99,1624.8 3162.99,1624.8 cw(c3162.99,1622.8) 3164.99,1622.8 3164.99,1595.8 ccw(c3166.99,1595.8) 3166.99,1593.8 3170.99,1593.8 ccw(c3170.99,1595.8) 3172.99,1595.8 3172.99,1622.8 cw(c3174.99,1622.8) 3174.99,1624.8 3178.99,1624.8 cw(c3178.99,1622.8) 3180.99,1622.8 3180.99,1595.8 ccw(c3182.99,1595.8) 3182.99,1593.8 3186.99,1593.8 ccw(c3186.99,1595.8) 3188.99,1595.8 3188.99,1622.8 cw(c3190.99,1622.8) 3190.99,1624.8 3194.99,1624.8 cw(c3194.99,1622.8) 3196.99,1622.8 3196.99,1595.8 ccw(c3198.99,1595.8) 3198.99,1593.8 3202.99,1593.8 ccw(c3202.99,1595.8) 3204.99,1595.8 3204.99,1601.8 cw(c3207.99,1601.8) 3207.99,1604.8 3212.53,1604.8 3228.58,1604.8 3258.63,1574.74 3294.59,1574.74 v2@3295.53,1573.8 ; v2@3293.58,1575.8 v2@3295.26,1577.48
  Layer 6 w3: v2@3295.53,1574.8 3295.21,1574.8 3277.53,1592.47 3277.53,1620.8 3277.53,1622.3 ccw(c3274.53,1622.3) 3274.53,1625.3 3259.53,1625.3 cw(c3259.53,1627.3) 3257.53,1627.3 3257.53,1631.3 cw(c3259.53,1631.3) 3259.53,1633.3 3295.53,1633.3 ccw(c3295.53,1635.3) 3297.53,1635.3 3297.53,1639.3 ccw(c3295.53,1639.3) 3295.53,1641.3 3280.53,1641.3 cw(c3280.53,1644.3) 3277.53,1644.3 3277.53,1654.47 3277.53,1665.8 3281.53,1669.8 3281.53,1679.8 3277.53,1683.8 3277.53,1924.91 v3(3295.24,1942.62) 3295.42,1942.8 v3@3295.53,1942.8
  other v2: 3295.26,1574.74
P4_0: U3.K2 U6.B1 U7.B1 | length 2361.9
  Top Layer w3: v2(3413.37,1574.74) 3449.53,1610.9 v3(3449.53,1699.8) v3@3451.53,1701.8
  Layer 3 w3: v5(2510,1715) 2521.8,1726.8 2890.53,1726.8 2902.53,1714.8 3157.03,1714.8 3157.53,1715.3 3191.77,1715.3 3193.53,1713.54 3193.53,1700.8 3197.53,1696.8 3204.53,1696.8 3206.53,1698.8 3206.53,1713.3 3208.53,1715.3 3224.53,1715.3 3226.03,1715.3 ccw(c3226.03,1718.3) 3229.03,1718.3 3229.03,1724.8 cw(c3231.03,1724.8) 3231.03,1726.8 3235.03,1726.8 cw(c3235.03,1724.8) 3237.03,1724.8 3237.03,1697.3 ccw(c3239.03,1697.3) 3239.03,1695.3 3243.03,1695.3 ccw(c3243.03,1697.3) 3245.03,1697.3 3245.03,1724.8 cw(c3247.03,1724.8) 3247.03,1726.8 3251.03,1726.8 cw(c3251.03,1724.8) 3253.03,1724.8 3253.03,1697.3 ccw(c3255.03,1697.3) 3255.03,1695.3 3259.03,1695.3 ccw(c3259.03,1697.3) 3261.03,1697.3 3261.03,1724.8 cw(c3263.03,1724.8) 3263.03,1726.8 3267.03,1726.8 cw(c3267.03,1724.8) 3269.03,1724.8 3269.03,1718.3 ccw(c3272.03,1718.3) 3272.03,1715.3 3283.53,1715.3 3287.53,1715.3 ; 3287.53,1715.8 3298.53,1715.8 3300.03,1715.8 ccw(c3300.03,1718.8) 3303.03,1718.8 3303.03,1724.8 cw(c3305.03,1724.8) 3305.03,1726.8 3309.03,1726.8 cw(c3309.03,1724.8) 3311.03,1724.8 3311.03,1697.3 ccw(c3313.03,1697.3) 3313.03,1695.3 3317.03,1695.3 ccw(c3317.03,1697.3) 3319.03,1697.3 3319.03,1724.8 cw(c3321.03,1724.8) 3321.03,1726.8 3325.03,1726.8 cw(c3325.03,1724.8) 3327.03,1724.8 3327.03,1697.3 ccw(c3329.03,1697.3) 3329.03,1695.3 3333.03,1695.3 ccw(c3333.03,1697.3) 3335.03,1697.3 3335.03,1724.8 cw(c3337.03,1724.8) 3337.03,1726.8 3341.03,1726.8 cw(c3341.03,1724.8) 3343.03,1724.8 3343.03,1697.3 ccw(c3345.03,1697.3) 3345.03,1695.3 3349.03,1695.3 ccw(c3349.03,1697.3) 3351.03,1697.3 3351.03,1724.8 cw(c3353.03,1724.8) 3353.03,1726.8 3357.03,1726.8 cw(c3357.03,1724.8) 3359.03,1724.8 3359.03,1697.3 ccw(c3361.03,1697.3) 3361.03,1695.3 3365.03,1695.3 ccw(c3365.03,1697.3) 3367.03,1697.3 3367.03,1724.8 cw(c3369.03,1724.8) 3369.03,1726.8 3373.03,1726.8 cw(c3373.03,1724.8) 3375.03,1724.8 3375.03,1697.3 ccw(c3377.03,1697.3) 3377.03,1695.3 3381.03,1695.3 ccw(c3381.03,1697.3) 3383.03,1697.3 3383.03,1724.8 cw(c3385.03,1724.8) 3385.03,1726.8 3389.03,1726.8 cw(c3389.03,1724.8) 3391.03,1724.8 3391.03,1697.3 ccw(c3393.03,1697.3) 3393.03,1695.3 3397.03,1695.3 ccw(c3397.03,1697.3) 3399.03,1697.3 3399.03,1724.8 cw(c3401.03,1724.8) 3401.03,1726.8 3405.03,1726.8 cw(c3405.03,1724.8) 3407.03,1724.8 3407.03,1697.3 ccw(c3409.03,1697.3) 3409.03,1695.3 3413.03,1695.3 ccw(c3413.03,1697.3) 3415.03,1697.3 3415.03,1712.3 cw(c3418.03,1712.3) 3418.03,1715.3 3427.53,1715.3 3434.03,1715.3 v3(3449.53,1699.8)
  Layer 4 w3: v4(2485.89,1515.48) 2512.58,1542.17 2512.58,1670.75 2504.53,1678.8 2504.53,1693.22 2510,1698.69 v5(2510,1715)
  Layer 6 w3: v3@3412.53,1945.8 v3@3412.53,1941.8 ; v2(3413.37,1574.74) 3394.53,1593.58 3394.53,1606.8 3394.53,1608.3 ccw(c3391.53,1608.3) 3391.53,1611.3 3376.53,1611.3 cw(c3376.53,1613.3) 3374.53,1613.3 3374.53,1617.3 cw(c3376.53,1617.3) 3376.53,1619.3 3412.53,1619.3 ccw(c3412.53,1621.3) 3414.53,1621.3 3414.53,1625.3 ccw(c3412.53,1625.3) 3412.53,1627.3 3397.53,1627.3 cw(c3397.53,1630.3) 3394.53,1630.3 3394.53,1674.8 3394.53,1727.8 3397.53,1730.8 3397.53,1742.55 3394.53,1745.55 3394.53,1923.8 v3@3412.53,1941.8 ; v3@3413.53,1941.8 v3@3412.53,1941.8
  other v3: 3413.35,1942.62
P4_1: R37.1 U3.J1 | length 811
  Top Layer w3: U3.J1@2505.58,1535.17 2505.58,1666.8 v2(2519.58,1680.8) ; v2(2823.53,1384.8) 2848.85,1384.8 R37.1@2849.85,1383.8
  Layer 5 w3: v2(2519.58,1680.8) 2534.58,1680.8 2547.28,1668.1 2668.1,1668.1 2692.8,1692.8 2818.58,1692.8 v2(2831.58,1679.8)
  Layer 6 w3: v2(2823.53,1384.8) 2823.53,1387.23 2820.5,1390.26 2820.5,1668.72 2830.78,1679 v2@2831,1679
P4_2: TP28.1 U3.F4 U6.B2 U7.B2 | length 2580.1
  Top Layer w3: U7.B2@3412.53,1904.8 3412.53,1904.06 v3(3413.35,1903.25)
  Layer 3 w3: v3(2742.49,1447.7) 2744.93,1447.7 2750.8,1453.57 2842.35,1453.57 2886.58,1497.8 2964.53,1497.8 2995.53,1528.8 3026.53,1528.8 3028.53,1530.8 3028.53,1538.04 3030.29,1539.8 3036.53,1539.8 3038.53,1537.8 3038.53,1530.8 3040.53,1528.8 3056.53,1528.8 3058.03,1528.8 ccw(c3058.03,1531.8) 3061.03,1531.8 3061.03,1546.8 cw(c3063.03,1546.8) 3063.03,1548.8 3067.03,1548.8 cw(c3067.03,1546.8) 3069.03,1546.8 3069.03,1510.8 ccw(c3071.03,1510.8) 3071.03,1508.8 3075.03,1508.8 ccw(c3075.03,1510.8) 3077.03,1510.8 3077.03,1546.8 cw(c3079.03,1546.8) 3079.03,1548.8 3083.03,1548.8 cw(c3083.03,1546.8) 3085.03,1546.8 3085.03,1510.8 ccw(c3087.03,1510.8) 3087.03,1508.8 3091.03,1508.8 ccw(c3091.03,1510.8) 3093.03,1510.8 3093.03,1546.8 cw(c3095.03,1546.8) 3095.03,1548.8 3099.03,1548.8 cw(c3099.03,1546.8) 3101.03,1546.8 3101.03,1510.8 ccw(c3103.03,1510.8) 3103.03,1508.8 3107.03,1508.8 ccw(c3107.03,1510.8) 3109.03,1510.8 3109.03,1546.8 cw(c3111.03,1546.8) 3111.03,1548.8 3115.03,1548.8 cw(c3115.03,1546.8) 3117.03,1546.8 3117.03,1510.8 ccw(c3119.03,1510.8) 3119.03,1508.8 3123.03,1508.8 ccw(c3123.03,1510.8) 3125.03,1510.8 3125.03,1546.8 cw(c3127.03,1546.8) 3127.03,1548.8 3131.03,1548.8 cw(c3131.03,1546.8) 3133.03,1546.8 3133.03,1510.8 ccw(c3135.03,1510.8) 3135.03,1508.8 3139.03,1508.8 ccw(c3139.03,1510.8) 3141.03,1510.8 3141.03,1546.8 cw(c3143.03,1546.8) 3143.03,1548.8 3147.03,1548.8 cw(c3147.03,1546.8) 3149.03,1546.8 3149.03,1510.8 ccw(c3151.03,1510.8) 3151.03,1508.8 3155.03,1508.8 ccw(c3155.03,1510.8) 3157.03,1510.8 3157.03,1546.8 cw(c3159.03,1546.8) 3159.03,1548.8 3163.03,1548.8 cw(c3163.03,1546.8) 3165.03,1546.8 3165.03,1510.8 ccw(c3167.03,1510.8) 3167.03,1508.8 3171.03,1508.8 ccw(c3171.03,1510.8) 3173.03,1510.8 3173.03,1546.8 cw(c3175.03,1546.8) 3175.03,1548.8 3179.03,1548.8 cw(c3179.03,1546.8) 3181.03,1546.8 3181.03,1510.8 ccw(c3183.03,1510.8) 3183.03,1508.8 3187.03,1508.8 ccw(c3187.03,1510.8) 3189.03,1510.8 3189.03,1546.8 cw(c3191.03,1546.8) 3191.03,1548.8 3195.03,1548.8 cw(c3195.03,1546.8) 3197.03,1546.8 3197.03,1510.8 ccw(c3199.03,1510.8) 3199.03,1508.8 3203.03,1508.8 ccw(c3203.03,1510.8) 3205.03,1510.8 3205.03,1546.8 cw(c3207.03,1546.8) 3207.03,1548.8 3211.03,1548.8 cw(c3211.03,1546.8) 3213.03,1546.8 3213.03,1510.8 ccw(c3215.03,1510.8) 3215.03,1508.8 3219.03,1508.8 ccw(c3219.03,1510.8) 3221.03,1510.8 3221.03,1546.8 cw(c3223.03,1546.8) 3223.03,1548.8 3227.03,1548.8 cw(c3227.03,1546.8) 3229.03,1546.8 3229.03,1510.8 ccw(c3231.03,1510.8) 3231.03,1508.8 3235.03,1508.8 ccw(c3235.03,1510.8) 3237.03,1510.8 3237.03,1546.8 cw(c3239.03,1546.8) 3239.03,1548.8 3243.03,1548.8 cw(c3243.03,1546.8) 3245.03,1546.8 3245.03,1531.8 ccw(c3248.03,1531.8) 3248.03,1528.8 3259.53,1528.8 3262.53,1528.8 3271.53,1519.8 3397.8,1519.8 v2(3413.37,1535.37)
  Layer 4 w3: v4(2564.63,1476.11) 2594.45,1446.3 2677.89,1446.3 2681.39,1449.8 2689.51,1449.8 2693.01,1453.3 2734.46,1453.3 2740.06,1447.7 v3(2742.49,1447.7) ; v2(3413.37,1535.37) 3413.37,1559.89 3431.53,1578.05 3431.53,1607.8 3431.53,1609.3 ccw(c3428.53,1609.3) 3428.53,1612.3 3413.53,1612.3 cw(c3413.53,1614.3) 3411.53,1614.3 3411.53,1618.3 cw(c3413.53,1618.3) 3413.53,1620.3 3449.53,1620.3 ccw(c3449.53,1622.3) 3451.53,1622.3 3451.53,1626.3 ccw(c3449.53,1626.3) 3449.53,1628.3 3413.53,1628.3 cw(c3413.53,1630.3) 3411.53,1630.3 3411.53,1634.3 cw(c3413.53,1634.3) 3413.53,1636.3 3438.49,1636.3 ccw(c3438.49,1638.3) 3440.49,1638.3 3440.49,1642.3 ccw(c3438.49,1642.3) 3438.49,1644.3 3434.53,1644.3 cw(c3434.53,1647.3) 3431.53,1647.3 3431.53,1694.8 3431.53,1716 3431.53,1727.98 3433.29,1729.74 3520.26,1729.74 3521.56,1731.04 3521.56,1741.44 3520.26,1742.74 3433.29,1742.74 3431.53,1744.5 3431.53,1746 3431.53,1885.8 3413.53,1903.8 v3@3413.53,1904.8
  Bottom Layer w3: v2(3413.37,1535.37) 3413.59,1535.58 3496.37,1535.58 TP28.1@3496.58,1535.8
P4_3: J11.15 J12.12 Q3.1 R15.2 U3.F6 | length 3831.3
  Top Layer w3: v4(2547.98,1453) 2548.18,1453 2564.43,1436.74 U3.F6@2564.63,1436.74 ; v2@3641.58,57.8 3643,59.22 J12.12@3643,127.46
  Layer 5 w3: v4(2547.98,1453) 2545.78,1453 2534.45,1441.67 2534.45,1412.71 2535.76,1411.39 2535.76,1380.98 2535.58,1380.8 2535.58,1330.8 2538.58,1327.8 2538.58,1307.8 2577.08,1269.3 2800.08,1269.3 2805.58,1263.8 3073.58,1263.8 3078.58,1268.8 3099.58,1268.8 3109.58,1258.8 3473.58,1258.8 3482.58,1267.8 3623.58,1267.8 3637.58,1253.8 v2(3646.58,1253.8)
  Layer 6 w3: v2(3644.58,61.8) 3621.58,84.8 3621.58,192.8 3656.58,227.8 3656.58,270.8 3704.54,318.75 3704.54,408.99 3668.08,445.45 3668.08,625.87 3676.58,634.37 3676.58,814.8 3646.58,844.8 v2(3646.58,1253.8) 3673.58,1280.8 3767.53,1280.8 3815.53,1328.8 3815.53,1463.8 3884.58,1532.84 3884.58,1777.75 3868.53,1793.8 3868.53,2105.8 3877.53,2114.8 3877.53,2155.47 J11.15@3876,2157 ; J11.15@3865.8,2146.8 J11.15@3872.58,2146.8
  Bottom Layer w3: v2@3646.58,1255.8 v2(3646.58,1253.8) 3646.58,1251.36 3651.32,1246.62 Q3.1@3651.32,1157.58